# Altium PCB GECKO3basic.PCBDOC
Units mm, origin at the board's own origin, x right, y up, seen from the top; angles counter-clockwise.
Board outline 85.5 x 54 mm, 2 copper layers (Top Layer, Bottom Layer), stack 1.621 mm thick; 5 components, 32 nets, 602 pads, 65 vias.
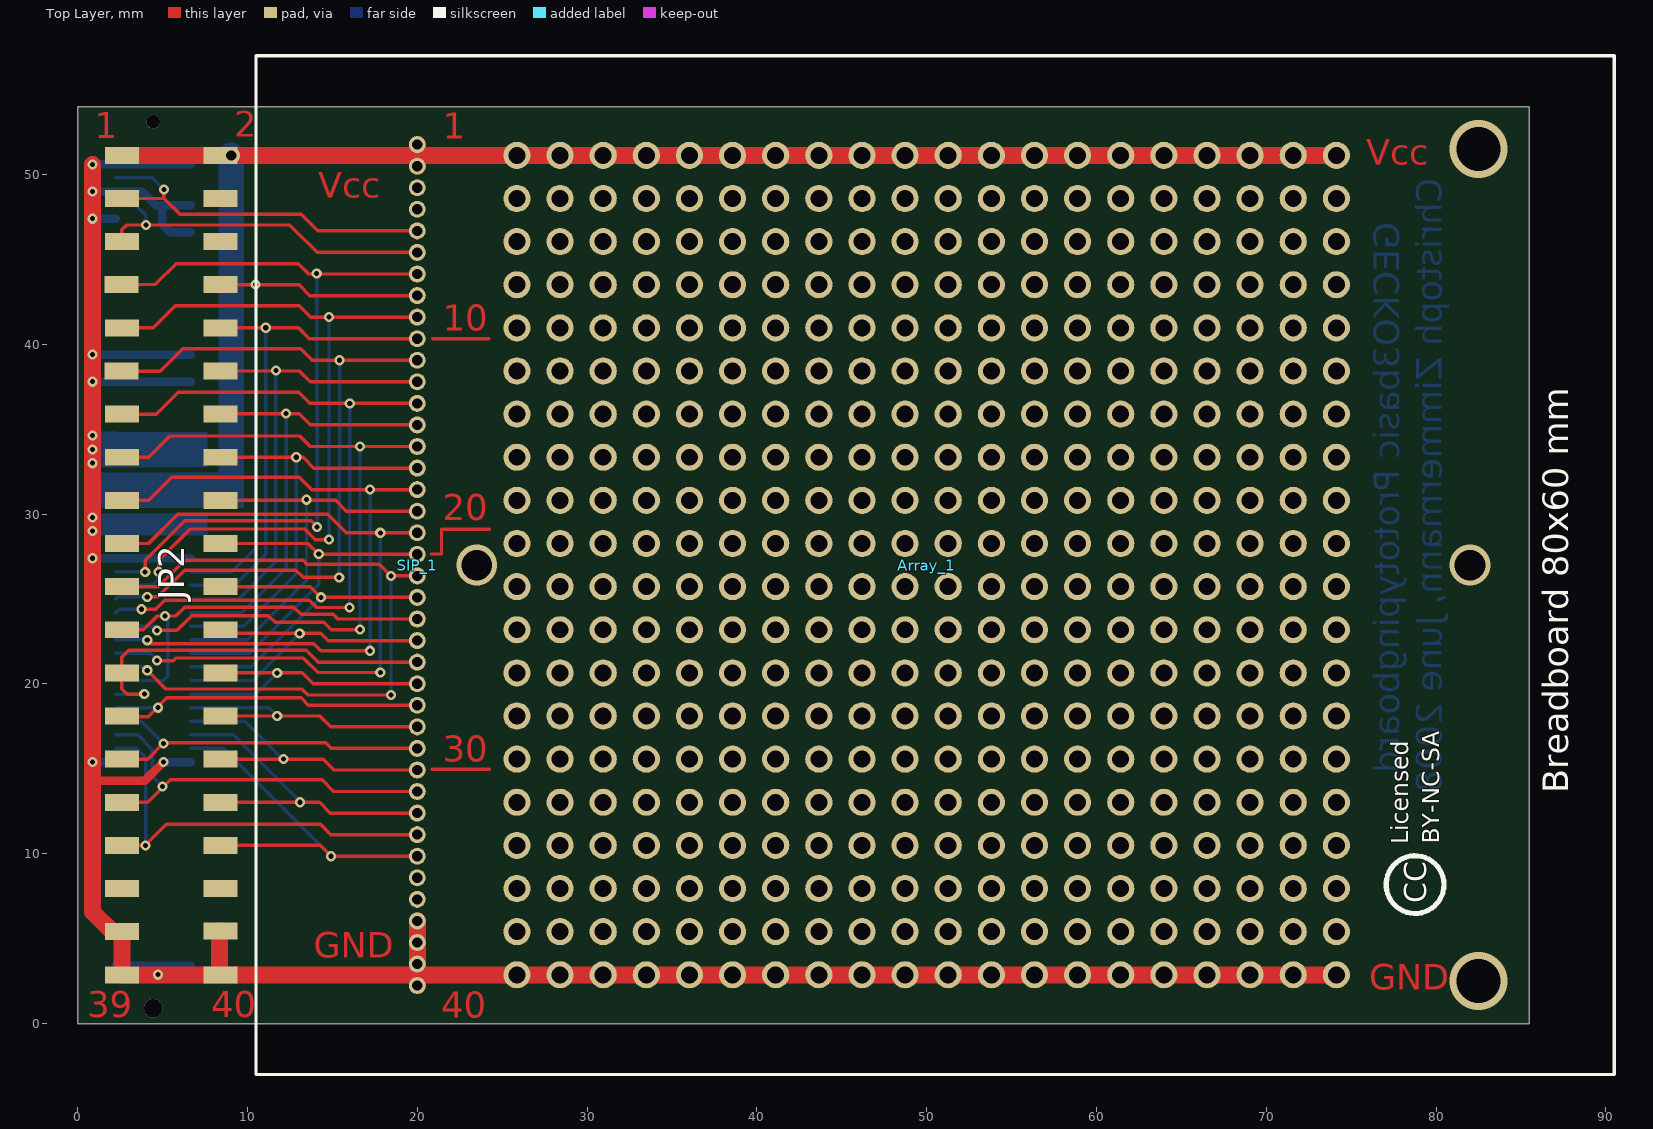
[diagram p0: Top Layer view]
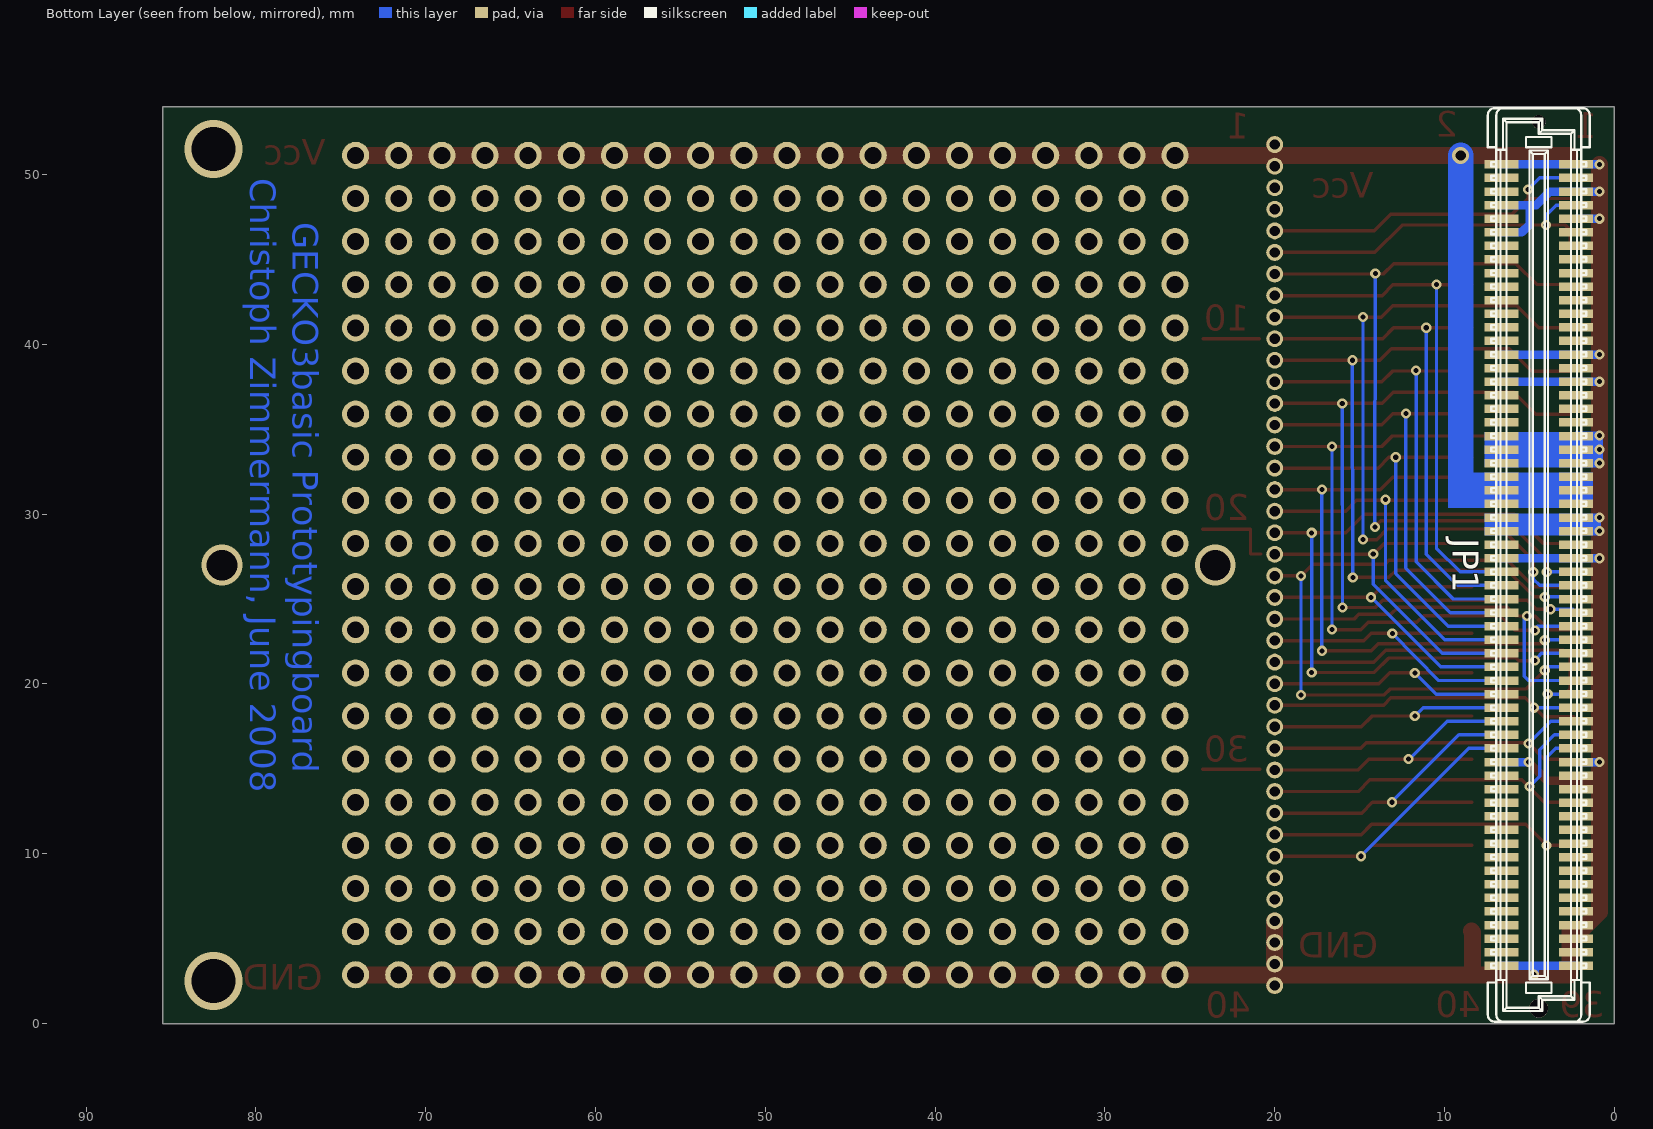
[diagram p1: Bottom Layer view, seen from below]

## Layer stack, top to bottom
Top Layer: signal copper 0.0356
Dielectric: core 1.55, FR-4, Dk 4.8
Bottom Layer: signal copper 0.0356

## Board outline
0,0 85.5,0 85.5,54 0,54

## Design rules (kind name [scope] priority, off if disabled: settings)
Clearance [All] p1: gap=0.2
ComponentClearance ComponentClearance_bottom [OnLayer('Bottom Layer') vs OnLayer('Bottom Layer')] p1: gap=0.254 collisioncheckmode=3 verticalgap=0.254
ComponentClearance ComponentClearance_top [OnLayer('Top Layer') vs OnLayer('Top Layer')] p2: gap=0.254 collisioncheckmode=3 verticalgap=0.254
HoleSize [All] p1: absolutevalues=TRUE maxlimit=5 minlimit=0.025 maxpercent=80.000 minpercent=20.000
PolygonConnect [All] p1: connectstyle=Relief reliefconductorwidth=0.254 reliefentries=4 polygonreliefangle="90 Angle"
RoomDefinition Gecko3Basic [InComponentClass('Gecko3Basic')] p1: confinementstyle=ConfineIn formatcopy=TRUE lockcomponents=FALSE outline -3.375,-3.85 88.3,-3.85 88.3,57.725 -3.375,57.725
RoutingVias [All] p1: holewidth=0.4 width=0.7 viastyle="Through Hole" minholewidth=0.3 minwidth=0.5 maxholewidth=5 maxwidth=5
SolderMaskExpansion [All] p1: expansion=0.102
TestPointUsage [All] p1: valid=0 allowmultiple=FALSE
Testpoint [All] p1: side=15 testpointundercomponent=TRUE minsize=1.016 maxsize=2.54 preferedsize=1.524 minholesize=0 maxholesize=1.016 preferedholesize=0.813 testpointgrid=0.025 style=1023 order=0123456789
Width [All] p1: maxlimit=5 minlimit=0.2 preferedwidth=1 toplayer_prefwidth=0.3 bottomlayer_prefwidth=0.3 minimp=50.000000 maximp=50.000000 favimp=50.000000
17 further rules are at their usual default settings.

## Components (designator, comment, footprint, x,y, rotation, side; value= is the part's Value field where it differs from the comment)
Array_1 "20X20ARRAY" PGA400X20 50,27 r0 top
JP1 "AMP-FH-120-Plug" amp_FH_.8mm_120pin_plug 4.45,27 r270 bottom locked
JP2 "NPPC202KFMS" NPPC202KFMS 5.5,27 r0 top locked
SIP_1 "1.27MMX40_EDGE CONNECTOR" 1.27mm_EdgeConnector 20,27 r0 top locked
? "CC License" CC-License 78.74,8.128 r90 top

## Footprints (in the part's own frame and the unit in brackets; to place one, negate y for a bottom-side part, rotate by r counter-clockwise, add the part's x,y. Pads: shape width x height; smd on the part's side, far side on the other; paste and mask are expansions set on the pad)
1.27mm_EdgeConnector [mm]
  round 1 hole 0.6: 1(0,24.763) 2(0,23.493) 3(0,22.223) 4(0,20.953) 5(0,19.683) 6(0,18.413) 7(0,17.143) 8(0,15.873) 9(0,14.603) 10(0,13.333) 11(0,12.063) 12(0,10.793) 13(0,9.523) 14(0,8.253) 15(0,6.983) 16(0,5.713) 17(0,4.443) 18(0,3.173) 19(0,1.903) 20(0,0.633) 21(0,-0.637) 22(0,-1.907) 23(0,-3.177) 24(0,-4.447) 25(0,-5.717) 26(0,-6.987) 27(0,-8.257) 28(0,-9.527) 29(0,-10.797) 30(0,-12.067) 31(0,-13.337) 32(0,-14.607) 33(0,-15.877) 34(0,-17.147) 35(0,-18.417) 36(0,-19.687) 37(0,-20.957) 38(0,-22.227) 39(0,-23.497) 40(0,-24.763)
amp_FH_.8mm_120pin_plug [mm] "AMP Free Height System, 0.8mm, 100 Pin, all Heights, Plug"
  round 0.8 hole 0.8: 0(-26.1,0)
  round 1.1 hole 1.1: 0(26.1,0)
  rect 0.5x2 smd: 1(-23.6,2.2) 2(-23.6,-2.2) 3(-22.8,2.2) 4(-22.8,-2.2) 5(-22,2.2) 6(-22,-2.2) 7(-21.2,2.2) 8(-21.2,-2.2) 9(-20.4,2.2) 10(-20.4,-2.2) 11(-19.6,2.2) 12(-19.6,-2.2) 13(-18.8,2.2) 14(-18.8,-2.2) 15(-18,2.2) 16(-18,-2.2) 17(-17.2,2.2) 18(-17.2,-2.2) 19(-16.4,2.2) 20(-16.4,-2.2) 21(-15.6,2.2) 22(-15.6,-2.2) 23(-14.8,2.2) 24(-14.8,-2.2) 25(-14,2.2) 26(-14,-2.2) 27(-13.2,2.2) 28(-13.2,-2.2) 29(-12.4,2.2) 30(-12.4,-2.2) 31(-11.6,2.2) 32(-11.6,-2.2) 33(-10.8,2.2) 34(-10.8,-2.2) 35(-10,2.2) 36(-10,-2.2) 37(-9.2,2.2) 38(-9.2,-2.2) 39(-8.4,2.2) 40(-8.4,-2.2) 41(-7.6,2.2) 42(-7.6,-2.2) 43(-6.8,2.2) 44(-6.8,-2.2) 45(-6,2.2) 46(-6,-2.2) 47(-5.2,2.2) 48(-5.2,-2.2) 49(-4.4,2.2) 50(-4.4,-2.2) 51(-3.6,2.2) 52(-3.6,-2.2) 53(-2.8,2.2) 54(-2.8,-2.2) 55(-2,2.2) 56(-2,-2.2) 57(-1.2,2.2) 58(-1.2,-2.2) 59(-0.4,2.2) 60(-0.4,-2.2) 61(0.4,2.2) 62(0.4,-2.2) 63(1.2,2.2) 64(1.2,-2.2) 65(2,2.2) 66(2,-2.2) 67(2.8,2.2) 68(2.8,-2.2) 69(3.6,2.2) 70(3.6,-2.2) 71(4.4,2.2) 72(4.4,-2.2) 73(5.2,2.2) 74(5.2,-2.2) 75(6,2.2) 76(6,-2.2) 77(6.8,2.2) 78(6.8,-2.2) 79(7.6,2.2) 80(7.6,-2.2) 81(8.4,2.2) 82(8.4,-2.2) 83(9.2,2.2) 84(9.2,-2.2) 85(10,2.2) 86(10,-2.2) 87(10.8,2.2) 88(10.8,-2.2) 89(11.6,2.2) 90(11.6,-2.2) 91(12.4,2.2) 92(12.4,-2.2) 93(13.2,2.2) 94(13.2,-2.2) 95(14,2.2) 96(14,-2.2) 97(14.8,2.2) 98(14.8,-2.2) 99(15.6,2.2) 100(15.6,-2.2) 101(16.4,2.2) 102(16.4,-2.2) 103(17.2,2.2) 104(17.2,-2.2) 105(18,2.2) 106(18,-2.2) 107(18.8,2.2) 108(18.8,-2.2) 109(19.6,2.2) 110(19.6,-2.2) 111(20.4,2.2) 112(20.4,-2.2) 113(21.2,2.2) 114(21.2,-2.2) 115(22,2.2) 116(22,-2.2) 117(22.8,2.2) 118(22.8,-2.2) 119(23.6,2.2) 120(23.6,-2.2)
  silkscreen extent -26.91,-3 26.89,3
CC-License [mm]
  silkscreen extent -1.65,-1.73 1.75,1.67
NPPC202KFMS [mm]
  rect 2x1 smd: 1(-2.9,24.13) 2(2.9,24.13) 3(-2.9,21.59) 4(2.9,21.59) 5(-2.9,19.05) 6(2.9,19.05) 7(-2.925,16.525) 8(2.9,16.51) 9(-2.9,13.97) 10(2.9,13.97) 11(-2.925,11.425) 12(2.9,11.43) 13(-2.9,8.89) 14(2.925,8.9) 15(-2.9,6.35) 16(2.9,6.35) 17(-2.9,3.81) 18(2.9,3.81) 19(-2.9,1.27) 20(2.9,1.27) 21(-2.9,-1.27) 22(2.9,-1.27) 23(-2.9,-3.81) 24(2.9,-3.81) 25(-2.9,-6.35) 26(2.9,-6.35) 27(-2.9,-8.89) 28(2.9,-8.89) 29(-2.9,-11.43) 30(2.9,-11.43) 31(-2.9,-13.97) 32(2.9,-13.97) 33(-2.9,-16.51) 34(2.9,-16.51) 35(-2.9,-19.05) 36(2.9,-19.05) 37(-2.9,-21.59) 38(2.925,-21.55) 39(-2.9,-24.13) 40(2.9,-24.13)
PGA400X20 [mm]
  round 1.6 hole 1: A1(-24.13,24.13) A2(-21.59,24.13) A3(-19.05,24.13) A4(-16.51,24.13) A5(-13.97,24.13) A6(-11.43,24.13) A7(-8.89,24.13) A8(-6.35,24.13) A9(-3.81,24.13) A10(-1.27,24.13) A11(1.27,24.13) A12(3.81,24.13) A13(6.35,24.13) A14(8.89,24.13) A15(11.43,24.13) A16(13.97,24.13) A17(16.51,24.13) A18(19.05,24.13) A19(21.59,24.13) A20(24.13,24.13) B1(-24.13,21.59) B2(-21.59,21.59) B3(-19.05,21.59) B4(-16.51,21.59) B5(-13.97,21.59) B6(-11.43,21.59) B7(-8.89,21.59) B8(-6.35,21.59) B9(-3.81,21.59) B10(-1.27,21.59) B11(1.27,21.59) B12(3.81,21.59) B13(6.35,21.59) B14(8.89,21.59) B15(11.43,21.59) B16(13.97,21.59) B17(16.51,21.59) B18(19.05,21.59) B19(21.59,21.59) B20(24.13,21.59) C1(-24.13,19.05) C2(-21.59,19.05) C3(-19.05,19.05) C4(-16.51,19.05) C5(-13.97,19.05) C6(-11.43,19.05) C7(-8.89,19.05) C8(-6.35,19.05) C9(-3.81,19.05) C10(-1.27,19.05) C11(1.27,19.05) C12(3.81,19.05) C13(6.35,19.05) C14(8.89,19.05) C15(11.43,19.05) C16(13.97,19.05) C17(16.51,19.05) C18(19.05,19.05) C19(21.59,19.05) C20(24.13,19.05) D1(-24.13,16.51) D2(-21.59,16.51) D3(-19.05,16.51) D4(-16.51,16.51) D5(-13.97,16.51) D6(-11.43,16.51) D7(-8.89,16.51) D8(-6.35,16.51) D9(-3.81,16.51) D10(-1.27,16.51) D11(1.27,16.51) D12(3.81,16.51) D13(6.35,16.51) D14(8.89,16.51) D15(11.43,16.51) D16(13.97,16.51) D17(16.51,16.51) D18(19.05,16.51) D19(21.59,16.51) D20(24.13,16.51) E1(-24.13,13.97) E2(-21.59,13.97) E3(-19.05,13.97) E4(-16.51,13.97) E5(-13.97,13.97) E6(-11.43,13.97) E7(-8.89,13.97) E8(-6.35,13.97) E9(-3.81,13.97) E10(-1.27,13.97) E11(1.27,13.97) E12(3.81,13.97) E13(6.35,13.97) E14(8.89,13.97) E15(11.43,13.97) E16(13.97,13.97) E17(16.51,13.97) E18(19.05,13.97) E19(21.59,13.97) E20(24.13,13.97) F1(-24.13,11.43) F2(-21.59,11.43) F3(-19.05,11.43) F4(-16.51,11.43) F5(-13.97,11.43) F6(-11.43,11.43) F7(-8.89,11.43) F8(-6.35,11.43) F9(-3.81,11.43) F10(-1.27,11.43) F11(1.27,11.43) F12(3.81,11.43) F13(6.35,11.43) F14(8.89,11.43) F15(11.43,11.43) F16(13.97,11.43) F17(16.51,11.43) F18(19.05,11.43) F19(21.59,11.43) F20(24.13,11.43) G1(-24.13,8.89) G2(-21.59,8.89) G3(-19.05,8.89) G4(-16.51,8.89) G5(-13.97,8.89) G6(-11.43,8.89) G7(-8.89,8.89) G8(-6.35,8.89) G9(-3.81,8.89) G10(-1.27,8.89) G11(1.27,8.89) G12(3.81,8.89) G13(6.35,8.89) G14(8.89,8.89) G15(11.43,8.89) G16(13.97,8.89) G17(16.51,8.89) G18(19.05,8.89) G19(21.59,8.89) G20(24.13,8.89) H1(-24.13,6.35) H2(-21.59,6.35) H3(-19.05,6.35) H4(-16.51,6.35) H5(-13.97,6.35) H6(-11.43,6.35) H7(-8.89,6.35) H8(-6.35,6.35) H9(-3.81,6.35) H10(-1.27,6.35) H11(1.27,6.35) H12(3.81,6.35) H13(6.35,6.35) H14(8.89,6.35) H15(11.43,6.35) H16(13.97,6.35) H17(16.51,6.35) H18(19.05,6.35) H19(21.59,6.35) H20(24.13,6.35) J1(-24.13,3.81) J2(-21.59,3.81) J3(-19.05,3.81) J4(-16.51,3.81) J5(-13.97,3.81) J6(-11.43,3.81) J7(-8.89,3.81) J8(-6.35,3.81) J9(-3.81,3.81) J10(-1.27,3.81) J11(1.27,3.81) J12(3.81,3.81) J13(6.35,3.81) J14(8.89,3.81) J15(11.43,3.81) J16(13.97,3.81) J17(16.51,3.81) J18(19.05,3.81) J19(21.59,3.81) J20(24.13,3.81) K1(-24.13,1.27) K2(-21.59,1.27) K3(-19.05,1.27) K4(-16.51,1.27) K5(-13.97,1.27) K6(-11.43,1.27) K7(-8.89,1.27) K8(-6.35,1.27) K9(-3.81,1.27) K10(-1.27,1.27) K11(1.27,1.27) K12(3.81,1.27) K13(6.35,1.27) K14(8.89,1.27) K15(11.43,1.27) K16(13.97,1.27) K17(16.51,1.27) K18(19.05,1.27) K19(21.59,1.27) K20(24.13,1.27) L1(-24.13,-1.27) L2(-21.59,-1.27) L3(-19.05,-1.27) L4(-16.51,-1.27) L5(-13.97,-1.27) L6(-11.43,-1.27) L7(-8.89,-1.27) L8(-6.35,-1.27) L9(-3.81,-1.27) L10(-1.27,-1.27) L11(1.27,-1.27) L12(3.81,-1.27) L13(6.35,-1.27) L14(8.89,-1.27) L15(11.43,-1.27) L16(13.97,-1.27) L17(16.51,-1.27) L18(19.05,-1.27) L19(21.59,-1.27) L20(24.13,-1.27) M1(-24.13,-3.81) M2(-21.59,-3.81) M3(-19.05,-3.81) M4(-16.51,-3.81) M5(-13.97,-3.81) M6(-11.43,-3.81) M7(-8.89,-3.81) M8(-6.35,-3.81) M9(-3.81,-3.81) M10(-1.27,-3.81) M11(1.27,-3.81) M12(3.81,-3.81) M13(6.35,-3.81) M14(8.89,-3.81) M15(11.43,-3.81) M16(13.97,-3.81) M17(16.51,-3.81) M18(19.05,-3.81) M19(21.59,-3.81) M20(24.13,-3.81) N1(-24.13,-6.35) N2(-21.59,-6.35) N3(-19.05,-6.35) N4(-16.51,-6.35) N5(-13.97,-6.35) N6(-11.43,-6.35) N7(-8.89,-6.35) N8(-6.35,-6.35) N9(-3.81,-6.35) N10(-1.27,-6.35) N11(1.27,-6.35) N12(3.81,-6.35) N13(6.35,-6.35) N14(8.89,-6.35) N15(11.43,-6.35) N16(13.97,-6.35) N17(16.51,-6.35) N18(19.05,-6.35) N19(21.59,-6.35) N20(24.13,-6.35) P1(-24.13,-8.89) P2(-21.59,-8.89) P3(-19.05,-8.89) P4(-16.51,-8.89) P5(-13.97,-8.89) P6(-11.43,-8.89) P7(-8.89,-8.89) P8(-6.35,-8.89) P9(-3.81,-8.89) P10(-1.27,-8.89) P11(1.27,-8.89) P12(3.81,-8.89) P13(6.35,-8.89) P14(8.89,-8.89) P15(11.43,-8.89) P16(13.97,-8.89) P17(16.51,-8.89) P18(19.05,-8.89) P19(21.59,-8.89) P20(24.13,-8.89) R1(-24.13,-11.43) R2(-21.59,-11.43) R3(-19.05,-11.43) R4(-16.51,-11.43) R5(-13.97,-11.43) R6(-11.43,-11.43) R7(-8.89,-11.43) R8(-6.35,-11.43) R9(-3.81,-11.43) R10(-1.27,-11.43) R11(1.27,-11.43) R12(3.81,-11.43) R13(6.35,-11.43) R14(8.89,-11.43) R15(11.43,-11.43) R16(13.97,-11.43) R17(16.51,-11.43) R18(19.05,-11.43) R19(21.59,-11.43) R20(24.13,-11.43) T1(-24.13,-13.97) T2(-21.59,-13.97) T3(-19.05,-13.97) T4(-16.51,-13.97) T5(-13.97,-13.97) T6(-11.43,-13.97) T7(-8.89,-13.97) T8(-6.35,-13.97) T9(-3.81,-13.97) T10(-1.27,-13.97) T11(1.27,-13.97) T12(3.81,-13.97) T13(6.35,-13.97) T14(8.89,-13.97) T15(11.43,-13.97) T16(13.97,-13.97) T17(16.51,-13.97) T18(19.05,-13.97) T19(21.59,-13.97) T20(24.13,-13.97) U1(-24.13,-16.51) U2(-21.59,-16.51) U3(-19.05,-16.51) U4(-16.51,-16.51) U5(-13.97,-16.51) U6(-11.43,-16.51) U7(-8.89,-16.51) U8(-6.35,-16.51) U9(-3.81,-16.51) U10(-1.27,-16.51) U11(1.27,-16.51) U12(3.81,-16.51) U13(6.35,-16.51) U14(8.89,-16.51) U15(11.43,-16.51) U16(13.97,-16.51) U17(16.51,-16.51) U18(19.05,-16.51) U19(21.59,-16.51) U20(24.13,-16.51) V1(-24.13,-19.05) V2(-21.59,-19.05) V3(-19.05,-19.05) V4(-16.51,-19.05) V5(-13.97,-19.05) V6(-11.43,-19.05) V7(-8.89,-19.05) V8(-6.35,-19.05) V9(-3.81,-19.05) V10(-1.27,-19.05) V11(1.27,-19.05) V12(3.81,-19.05) V13(6.35,-19.05) V14(8.89,-19.05) V15(11.43,-19.05) V16(13.97,-19.05) V17(16.51,-19.05) V18(19.05,-19.05) V19(21.59,-19.05) V20(24.13,-19.05) W1(-24.13,-21.59) W2(-21.59,-21.59) W3(-19.05,-21.59) W4(-16.51,-21.59) W5(-13.97,-21.59) W6(-11.43,-21.59) W7(-8.89,-21.59) W8(-6.35,-21.59) W9(-3.81,-21.59) W10(-1.27,-21.59) W11(1.27,-21.59) W12(3.81,-21.59) W13(6.35,-21.59) W14(8.89,-21.59) W15(11.43,-21.59) W16(13.97,-21.59) W17(16.51,-21.59) W18(19.05,-21.59) W19(21.59,-21.59) W20(24.13,-21.59) Y1(-24.13,-24.13) Y2(-21.59,-24.13) Y3(-19.05,-24.13) Y4(-16.51,-24.13) Y5(-13.97,-24.13) Y6(-11.43,-24.13) Y7(-8.89,-24.13) Y8(-6.35,-24.13) Y9(-3.81,-24.13) Y10(-1.27,-24.13) Y11(1.27,-24.13) Y12(3.81,-24.13) Y13(6.35,-24.13) Y14(8.89,-24.13) Y15(11.43,-24.13) Y16(13.97,-24.13) Y17(16.51,-24.13) Y18(19.05,-24.13) Y19(21.59,-24.13) Y20(24.13,-24.13)

## Part data
JP1: "AMP Free Height System, 0.8mm, 120 Pin, Plug"
JP2: library part 2203-34011

## Via types
v1: diameter 0.6, hole 0.3, Top Layer to Bottom Layer, tented both sides, 60 vias
v2: diameter 2.4, hole 1.8, Top Layer to Bottom Layer, 2 vias
v3: diameter 1, hole 0.6, Top Layer to Bottom Layer, tented both sides, 1 vias
v4: diameter 3.4, hole 2.6, Top Layer to Bottom Layer, 1 vias
v5: diameter 3.43, hole 2.6, Top Layer to Bottom Layer, 1 vias

## Nets (pads, with @x,y where several pads share a name; then routed paths per layer and width w, separated by ;. In a path a pad name is that pad's centre, name@x,y a point inside that pad or via, vN(x,y) a via of type N, cw(c..) or ccw(c..) an arc to the next point about the centre after c; other vN are vias at no path point)
ENCODER0: JP1.62 JP2.8 SIP_1.8 | length 31.8
  Top Layer w0.2: JP2.8 13.04,43.51 13.677,42.873 SIP_1.8
  Bottom Layer w0.2: JP1.62 9.075,26.6 10.475,28 v1(10.475,43.525)
ENCODER1: JP1.64 JP2.10 SIP_1.10 | length 30.4
  Top Layer w0.2: JP2.10 13.005,40.97 13.642,40.333 SIP_1.10
  Bottom Layer w0.2: JP1.64 9.25,25.8 11.075,27.625 v1(11.075,40.975)
ENCODER2: JP1.66 JP2.12 SIP_1.12 | length 29.1
  Top Layer w0.2: JP2.12 13.063,38.43 13.7,37.793 SIP_1.12
  Bottom Layer w0.2: JP1.66 9.475,25 11.675,27.2 v1(11.675,38.45)
ENCODER3: JP1.68 JP2.14 SIP_1.14 | length 27.7
  Top Layer w0.2: JP2.14 13.05,35.9 13.697,35.253 SIP_1.14
  Bottom Layer w0.2: JP1.68 9.65,24.2 12.275,26.825 v1(12.275,35.925)
ENCODER4: JP1.70 JP2.16 SIP_1.16 | length 26.3
  Top Layer w0.2: JP2.16 13.275,33.35 13.912,32.713 SIP_1.16
  Bottom Layer w0.2: JP1.70 9.775,23.4 12.875,26.5 v1(12.875,33.35) v1@12.875,33.275
ENCODER5: JP1.72 JP2.18 SIP_1.18 | length 24.9
  Top Layer w0.2: JP2.18 15.19,30.81 15.827,30.173 SIP_1.18
  Bottom Layer w0.2: JP1.72 10,22.6 13.475,26.075 v1(13.475,30.85)
ENCODER6: JP1.74 JP2.20 SIP_1.20 | length 22.9
  Top Layer w0.2: JP2.20 13.555,28.27 14.192,27.633 SIP_1.20
  Bottom Layer w0.2: JP1.74 10.125,21.8 14.2,25.875 v1(14.2,27.65)
ENCODER7: JP1.76 JP2.22 SIP_1.22 | length 21.2
  Top Layer w0.2: JP2.22 13.695,25.73 v1(14.325,25.1) SIP_1.22@20,25.1
  Bottom Layer w0.2: JP1.76 10.225,21 v1(14.325,25.1)
EXTCLK0: JP1.7 JP2.5 SIP_1.6 | length 21.5
  Top Layer w0.2: JP2.5 2.6,46.75 2.875,47.025 12.5,47.025 14.112,45.413 SIP_1.6
  Bottom Layer w0.2: JP1.7 3.425,48.2 4.025,47.6 v1(4.025,47.025)
GND: Array_1.Y1 Array_1.Y2 Array_1.Y3 Array_1.Y4 Array_1.Y5 Array_1.Y6 Array_1.Y7 Array_1.Y8 Array_1.Y9 Array_1.Y10 Array_1.Y11 Array_1.Y12 Array_1.Y13 Array_1.Y14 Array_1.Y15 Array_1.Y16 Array_1.Y17 Array_1.Y18 Array_1.Y19 Array_1.Y20 JP1.1 JP1.2 JP1.5 JP1.8 JP1.9 JP1.12 JP1.29 JP1.30 JP1.33 JP1.34 JP1.41 JP1.42 JP1.43 JP1.44 JP1.45 JP1.46 JP1.53 JP1.54 JP1.55 JP1.56 JP1.59 JP1.60 JP1.89 JP1.90 JP1.119 JP1.120 JP2.37 JP2.38 JP2.39 JP2.40 SIP_1.37 SIP_1.38 SIP_1.39 SIP_1.40 | length 190.2
  Top Layer w0.5: 0.875,14.3 3.95,14.3 v1(5.05,15.4)
  Top Layer w1: v1(0.875,50.6) 0.875,6.575 2.04,5.41 JP2.37 JP2.39 Array_1.Y20 ; JP2.40@8.35,2.87 8.35,5.375 JP2.38 ; SIP_1.40 SIP_1.37
  Bottom Layer w0.5: v1(0.875,15.4) JP1.89 ; v1(0.875,27.4) JP1.60 ; v1(0.875,33) JP1.46 ; v1(0.875,33.8) JP1.44 ; v1(0.875,34.625) 2.25,34.619 JP1.42 ; v1(0.875,37.8) JP1.34 ; v1(0.875,39.4) JP1.30 ; v1(0.875,47.4) JP1.9 ; v1(0.875,49) 3.8,49 4.6,48.2 JP1.8 ; v1(0.875,50.6) JP1.2 ; JP1.119 4.7,3.4 ; v1(4.725,2.875) 4.7,2.9 4.7,3.4 ; 4.975,48.2 4.975,47.075 5.45,46.6 JP1.12 ; v1(5.05,15.4) JP1.90 ; JP1.120 4.7,3.4
  other v1: 0.875,29 0.875,29.8
GPIO1_19: JP1.84 JP2.30 SIP_1.30 | length 18.2
  Top Layer w0.2: JP2.30 14.455,15.57 15.092,14.933 SIP_1.30
  Bottom Layer w0.2: JP1.84 9.845,17.8 v1@12.075,15.57
  other v1: 12.125,15.57
GPIO1_20: JP1.85 JP2.31 SIP_1.31 | length 23.2
  Top Layer w0.2: JP2.31 4.13,13.03 5.45,14.35 14.4,14.35 15.087,13.663 SIP_1.31
  Bottom Layer w0.2: JP1.85 3.525,17 4.4,16.125 4.4,14.55 v1(5,13.95)
GPIO1_21: JP1.86 JP2.32 SIP_1.32 | length 20
  Top Layer w0.2: JP2.32 14.245,13.03 14.882,12.393 SIP_1.32
  Bottom Layer w0.2: JP1.86 9.15,17 v1@13.155,12.995
  other v1: 13.1,13.03
GPIO1_22: JP1.87 JP2.33 SIP_1.33 | length 25.3
  Top Layer w0.2: JP2.33 3.99,10.49 5.225,11.725 14.3,11.725 14.902,11.123 SIP_1.33
  Bottom Layer w0.2: JP1.87 3.45,16.2 4,15.65 v1(4,10.475)
GPIO1_23: JP1.88 JP2.34 SIP_1.34 | length 22.8
  Top Layer w0.2: JP2.34 14.285,10.49 14.922,9.853 SIP_1.34
  Bottom Layer w0.2: JP1.88 8.575,16.2 v1(14.925,9.85)
LINESENSORCLK: JP1.82 JP2.28 SIP_1.28 | length 17.2
  Top Layer w0.2: JP2.28 14.265,18.11 14.902,17.473 SIP_1.28
  Bottom Layer w0.2: JP1.82 11.26,18.6 v1(11.75,18.11)
LINESENSORIN1: JP1.77 JP2.23 SIP_1.23 | length 25
  Top Layer w0.2: JP2.23 3.865,23.19 4.675,24 5.775,24 6.3,24.525 12.729,24.525 13.154,24.1 15.05,24.1 15.327,23.823 SIP_1.23
  Bottom Layer w0.2: JP1.77 5.05,20.2 5.3,20.45 5.3,23.85 v1(5.15,24)
LINESENSORIN2: JP1.79 JP2.25 SIP_1.25 | length 22.8
  Top Layer w0.2: v1(3.925,19.4) 2.925,19.4 2.6,19.725 2.6,21.575 3,21.975 13.475,21.975 14.167,21.283 SIP_1.25
  Bottom Layer w0.2: JP1.79 v1(3.925,19.4)
LINESENSOROUT1: JP1.78 JP2.24 SIP_1.24 | length 19.4
  Top Layer w0.2: JP2.24@8.4,22.975 14.325,22.975 14.747,22.553 SIP_1.24
  Bottom Layer w0.2: JP1.78 10.35,20.2 v1(13.075,22.975)
LINESENSOROUT2: JP1.80 JP2.26 SIP_1.26 | length 17.5
  Top Layer w0.2: JP2.26 13.225,20.65 13.862,20.013 SIP_1.26
  Bottom Layer w0.2: JP1.80 10.5,19.4 v1(11.75,20.65)
PWM0: JP1.61 JP2.7 SIP_1.7 | length 46.7
  Top Layer w0.2: JP2.7 4.575,43.525 5.8,44.75 13,44.75 13.607,44.143 SIP_1.7 ; v1(3.975,26.6) 3.975,27.275 6.3,29.6 13.75,29.6 v1(14.1,29.25)
  Bottom Layer w0.2: JP1.61 v1(3.975,26.6) ; v1(14.075,44.168) v1(14.1,29.25)
PWM1: JP1.63 JP2.9 SIP_1.9 | length 48.7
  Top Layer w0.2: JP2.9 4.445,40.97 5.75,42.275 13.05,42.275 13.722,41.603 SIP_1.9 ; v1(4.775,26.6) 4.775,27.275 6.625,29.125 13.375,29.125 14,28.5 v1(14.8,28.5) ; v1(14.8,41.603) 17.3,41.6
  Bottom Layer w0.2: JP1.63 4.4,25.8 4.775,26.175 v1(4.775,26.6) ; v1(14.8,28.5) v1(14.8,41.603)
PWM2: JP1.65 JP2.11 SIP_1.11 | length 45.1
  Top Layer w0.2: JP2.11 4.85,38.425 6.175,39.75 13.125,39.75 13.812,39.063 SIP_1.11 ; v1(4.1,25.125) 4.725,25.125 6.3,26.7 12.85,26.7 13.275,26.275 v1(15.4,26.275)
  Bottom Layer w0.2: JP1.65 2.375,25.125 v1(4.1,25.125) ; v1(15.4,26.275) v1(15.425,39.063)
PWM3: JP1.67 JP2.13 SIP_1.13 | length 44.5
  Top Layer w0.2: JP2.13 4.64,35.89 5.925,37.175 13.025,37.175 13.677,36.523 SIP_1.13 ; v1(3.75,24.4) 4.6,24.4 5.125,24.925 13.65,24.925 14.075,24.5 v1(16.006,24.5)
  Bottom Layer w0.2: JP1.67 2.45,24.4 v1(3.75,24.4) ; v1(16.006,24.5) v1(16.025,36.523)
PWM4: JP1.69 JP2.15 SIP_1.15 | length 44.2
  Top Layer w0.2: JP2.15 4.175,33.35 5.425,34.6 13.075,34.6 13.692,33.983 SIP_1.15 ; v1(4.675,23.15) 5.85,23.15 6.725,24.025 11.225,24.025 11.625,23.625 14.5,23.625 14.925,23.2 v1(16.625,23.2)
  Bottom Layer w0.2: JP1.69 4.525,23.4 v1(4.675,23.15) ; v1(16.625,23.2) v1(16.625,33.983)
PWM5: JP1.71 JP2.17 SIP_1.17 | length 42.9
  Top Layer w0.2: JP2.17 4.185,30.81 5.55,32.175 13.05,32.175 13.782,31.443 SIP_1.17 ; v1(4.1,22.575) 4.3,22.375 13.9,22.375 14.325,21.95 v1(17.225,21.95)
  Bottom Layer w0.2: JP1.71 v1@4.025,22.6 ; v1(17.225,21.95) v1(17.225,31.443)
PWM6: JP1.73 JP2.19 SIP_1.19 | length 43
  Top Layer w0.2: JP2.19 4.17,28.27 5.9,30 14.728,30 15.825,28.903 SIP_1.19 ; v1(4.675,21.375) 5.625,21.375 5.775,21.525 13.3,21.525 14.15,20.675 v1(17.825,20.675)
  Bottom Layer w0.2: JP1.73 4.3,21.8 v1(4.675,21.375) ; v1(17.825,20.675) v1(17.825,28.9)
PWM7: JP1.75 JP2.21 SIP_1.21 | length 42.5
  Top Layer w0.2: JP2.21 4.755,25.73 6.3,27.275 13.275,27.275 13.5,27.05 17.763,27.05 18.45,26.363 SIP_1.21 ; v1(4.1,20.8) 5.2,19.7 13.2,19.7 13.55,19.35 v1(18.45,19.35)
  Bottom Layer w0.2: JP1.75 3.95,21 v1@4.225,20.725 ; v1(18.45,19.35) v1(18.45,26.35)
RESET: JP1.3 JP2.3 SIP_1.5 | length 21.8
  Top Layer w0.2: JP2.3 5.085,48.59 ; v1(5.075,49.125) 5.075,48.6 6.025,47.65 13.175,47.65 14.142,46.683 SIP_1.5
  Bottom Layer w0.2: JP1.3 4.4,49.8 v1(5.075,49.125)
SCL3V3: JP1.83 JP2.29 SIP_1.29 | length 21.3
  Top Layer w0.2: JP2.29 4.12,15.57 5.075,16.525 14.6,16.525 14.922,16.203 SIP_1.29
  Bottom Layer w0.2: JP1.83 3.75,17.8 v1(5.05,16.5)
SDA3V3: JP1.81 JP2.27 SIP_1.27 | length 20.7
  Top Layer w0.2: JP2.27@2.4,18.075 4.15,18.075 5.25,19.175 13.159,19.175 13.584,18.75 ; 13.584,18.743 SIP_1.27
  Bottom Layer w0.2: JP1.81 v1(4.725,18.6)
VCC3V3: Array_1.A1 Array_1.A2 Array_1.A3 Array_1.A4 Array_1.A5 Array_1.A6 Array_1.A7 Array_1.A8 Array_1.A9 Array_1.A10 Array_1.A11 Array_1.A12 Array_1.A13 Array_1.A14 Array_1.A15 Array_1.A16 Array_1.A17 Array_1.A18 Array_1.A19 Array_1.A20 JP1.47 JP1.48 JP1.49 JP1.50 JP1.51 JP1.52 JP2.1 JP2.2 SIP_1.1 SIP_1.2 | length 92.8
  Top Layer w0.2: SIP_1.1 SIP_1.1@20,51.8
  Top Layer w1: JP2.1 19.895,51.13 20,51.025 ; SIP_1.2 SIP_1.1 ; 20,51.13 Array_1.A20
  Bottom Layer w1.5: 9.05,31.175 v3(9.05,51.125)
pads on no net: Array_1.B1 Array_1.B2 Array_1.B3 Array_1.B4 Array_1.B5 Array_1.B6 Array_1.B7 Array_1.B8 Array_1.B9 Array_1.B10 Array_1.B11 Array_1.B12 Array_1.B13 Array_1.B14 Array_1.B15 Array_1.B16 Array_1.B17 Array_1.B18 Array_1.B19 Array_1.B20 Array_1.C1 Array_1.C2 Array_1.C3 Array_1.C4 Array_1.C5 Array_1.C6 Array_1.C7 Array_1.C8 Array_1.C9 Array_1.C10 Array_1.C11 Array_1.C12 Array_1.C13 Array_1.C14 Array_1.C15 Array_1.C16 Array_1.C17 Array_1.C18 Array_1.C19 Array_1.C20 Array_1.D1 Array_1.D2 Array_1.D3 Array_1.D4 Array_1.D5 Array_1.D6 Array_1.D7 Array_1.D8 Array_1.D9 Array_1.D10 Array_1.D11 Array_1.D12 Array_1.D13 Array_1.D14 Array_1.D15 Array_1.D16 Array_1.D17 Array_1.D18 Array_1.D19 Array_1.D20 Array_1.E1 Array_1.E2 Array_1.E3 Array_1.E4 Array_1.E5 Array_1.E6 Array_1.E7 Array_1.E8 Array_1.E9 Array_1.E10 Array_1.E11 Array_1.E12 Array_1.E13 Array_1.E14 Array_1.E15 Array_1.E16 Array_1.E17 Array_1.E18 Array_1.E19 Array_1.E20 Array_1.F1 Array_1.F2 Array_1.F3 Array_1.F4 Array_1.F5 Array_1.F6 Array_1.F7 Array_1.F8 Array_1.F9 Array_1.F10 Array_1.F11 Array_1.F12 Array_1.F13 Array_1.F14 Array_1.F15 Array_1.F16 Array_1.F17 Array_1.F18 Array_1.F19 Array_1.F20 Array_1.G1 Array_1.G2 Array_1.G3 Array_1.G4 Array_1.G5 Array_1.G6 Array_1.G7 Array_1.G8 Array_1.G9 Array_1.G10 Array_1.G11 Array_1.G12 Array_1.G13 Array_1.G14 Array_1.G15 Array_1.G16 Array_1.G17 Array_1.G18 Array_1.G19 Array_1.G20 Array_1.H1 Array_1.H2 Array_1.H3 Array_1.H4 Array_1.H5 Array_1.H6 Array_1.H7 Array_1.H8 Array_1.H9 Array_1.H10 Array_1.H11 Array_1.H12 Array_1.H13 Array_1.H14 Array_1.H15 Array_1.H16 Array_1.H17 Array_1.H18 Array_1.H19 Array_1.H20 Array_1.J1 Array_1.J2 Array_1.J3 Array_1.J4 Array_1.J5 Array_1.J6 Array_1.J7 Array_1.J8 Array_1.J9 Array_1.J10 Array_1.J11 Array_1.J12 Array_1.J13 Array_1.J14 Array_1.J15 Array_1.J16 Array_1.J17 Array_1.J18 Array_1.J19 Array_1.J20 Array_1.K1 Array_1.K2 Array_1.K3 Array_1.K4 Array_1.K5 Array_1.K6 Array_1.K7 Array_1.K8 Array_1.K9 Array_1.K10 Array_1.K11 Array_1.K12 Array_1.K13 Array_1.K14 Array_1.K15 Array_1.K16 Array_1.K17 Array_1.K18 Array_1.K19 Array_1.K20 Array_1.L1 Array_1.L2 Array_1.L3 Array_1.L4 Array_1.L5 Array_1.L6 Array_1.L7 Array_1.L8 Array_1.L9 Array_1.L10 Array_1.L11 Array_1.L12 Array_1.L13 Array_1.L14 Array_1.L15 Array_1.L16 Array_1.L17 Array_1.L18 Array_1.L19 Array_1.L20 Array_1.M1 Array_1.M2 Array_1.M3 Array_1.M4 Array_1.M5 Array_1.M6 Array_1.M7 Array_1.M8 Array_1.M9 Array_1.M10 Array_1.M11 Array_1.M12 Array_1.M13 Array_1.M14 Array_1.M15 Array_1.M16 Array_1.M17 Array_1.M18 Array_1.M19 Array_1.M20 Array_1.N1 Array_1.N2 Array_1.N3 Array_1.N4 Array_1.N5 Array_1.N6 Array_1.N7 Array_1.N8 Array_1.N9 Array_1.N10 Array_1.N11 Array_1.N12 Array_1.N13 Array_1.N14 Array_1.N15 Array_1.N16 Array_1.N17 Array_1.N18 Array_1.N19 Array_1.N20 Array_1.P1 Array_1.P2 Array_1.P3 Array_1.P4 Array_1.P5 Array_1.P6 Array_1.P7 Array_1.P8 Array_1.P9 Array_1.P10 Array_1.P11 Array_1.P12 Array_1.P13 Array_1.P14 Array_1.P15 Array_1.P16 Array_1.P17 Array_1.P18 Array_1.P19 Array_1.P20 Array_1.R1 Array_1.R2 Array_1.R3 Array_1.R4 Array_1.R5 Array_1.R6 Array_1.R7 Array_1.R8 Array_1.R9 Array_1.R10 Array_1.R11 Array_1.R12 Array_1.R13 Array_1.R14 Array_1.R15 Array_1.R16 Array_1.R17 Array_1.R18 Array_1.R19 Array_1.R20 Array_1.T1 Array_1.T2 Array_1.T3 Array_1.T4 Array_1.T5 Array_1.T6 Array_1.T7 Array_1.T8 Array_1.T9 Array_1.T10 Array_1.T11 Array_1.T12 Array_1.T13 Array_1.T14 Array_1.T15 Array_1.T16 Array_1.T17 Array_1.T18 Array_1.T19 Array_1.T20 Array_1.U1 Array_1.U2 Array_1.U3 Array_1.U4 Array_1.U5 Array_1.U6 Array_1.U7 Array_1.U8 Array_1.U9 Array_1.U10 Array_1.U11 Array_1.U12 Array_1.U13 Array_1.U14 Array_1.U15 Array_1.U16 Array_1.U17 Array_1.U18 Array_1.U19 Array_1.U20 Array_1.V1 Array_1.V2 Array_1.V3 Array_1.V4 Array_1.V5 Array_1.V6 Array_1.V7 Array_1.V8 Array_1.V9 Array_1.V10 Array_1.V11 Array_1.V12 Array_1.V13 Array_1.V14 Array_1.V15 Array_1.V16 Array_1.V17 Array_1.V18 Array_1.V19 Array_1.V20 Array_1.W1 Array_1.W2 Array_1.W3 Array_1.W4 Array_1.W5 Array_1.W6 Array_1.W7 Array_1.W8 Array_1.W9 Array_1.W10 Array_1.W11 Array_1.W12 Array_1.W13 Array_1.W14 Array_1.W15 Array_1.W16 Array_1.W17 Array_1.W18 Array_1.W19 Array_1.W20 JP1.0 JP1.4 JP1.6 JP1.10 JP1.11 JP1.13 JP1.14 JP1.15 JP1.16 JP1.17 JP1.18 JP1.19 JP1.20 JP1.21 JP1.22 JP1.23 JP1.24 JP1.25 JP1.26 JP1.27 JP1.28 JP1.31 JP1.32 JP1.35 JP1.36 JP1.37 JP1.38 JP1.39 JP1.40 JP1.57 JP1.58 JP1.91 JP1.92 JP1.93 JP1.94 JP1.95 JP1.96 JP1.97 JP1.98 JP1.99 JP1.100 JP1.101 JP1.102 JP1.103 JP1.104 JP1.105 JP1.106 JP1.107 JP1.108 JP1.109 JP1.110 JP1.111 JP1.112 JP1.113 JP1.114 JP1.115 JP1.116 JP1.117 JP1.118 JP2.4 JP2.6 JP2.35 JP2.36 SIP_1.3 SIP_1.4 SIP_1.35 SIP_1.36
copper on no net: | length 11.6
  Top Layer w0.2: 20.825,27.65 21.425,27.65 21.425,29.1 24.25,29.1 ; 20.875,14.975 24.25,14.975 ; 20.9,40.325 24.225,40.325
  other v2: 23.5,27 82,27
  other v4: 82.5,2.5
  other v5: 82.5,51.5

## Other copper
Top Layer:
  text "2" at 9.225,52.225 h1.5
  text "1" at 1,52.125 h1.52
  text "1" at 21.5,52.1 h1.52
  text "Vcc" at 75.9,50.575 h1.5
  text "Vcc" at 14.175,48.625 h1.5
  text "10" at 21.5,40.8 h1.52
  text "20" at 21.5,29.625 h1.52
  text "30" at 21.5,15.425 h1.52
  text "GND" at 13.9,3.875 h1.5
  text "GND" at 76.075,2 h1.5
  text "39" at 0.575,0.375 h1.52
  text "40" at 7.875,0.375 h1.52
  text "40" at 21.4,0.35 h1.52
Bottom Layer:
  rectangle net VCC3V3: 1.25,30.35 9.8,32.45
  rectangle net GND: 0.675,32.775 7.65,34.85
  rectangle net GND: 0.775,28.75 7.65,30.05
  text "Christoph Zimmermann, June 2008" at 80.325,49.775 h1.5 r90
  text "GECKO3basic Prototypingboard" at 77.825,47.2 h1.5 r90

## Silkscreen, mask and mechanical layers (free items; w line width, h text height)
Top Overlay:
  lines w0.2: 10.5,-3 90.5,-3 90.5,57 10.5,57 10.5,-3
  text "Breadboard 80x60 mm" at 87.775,13.575 h1.5 r90
Mechanical 1:
  the board outline again, w0.2

## Dimensions
0,0 to 0,54 on Mechanical 2
0,0 to 85.5,0 on Mechanical 2
10.5,57 to 23.5,27 on Mechanical 2
10.5,57 to 82,27 on Mechanical 2

## Text inside footprints (layer, text, board x,y; h text height)
?: Top Overlay "Licensed" at 78.365,10.553 h1 r90; Top Overlay "BY-NC-SA" at 80.19,10.578 h1 r90; Top Overlay "CC" at 79.415,7.078 h1.3 r90